# EAGLE board tulip breakout (EAGLE 9.6.2)
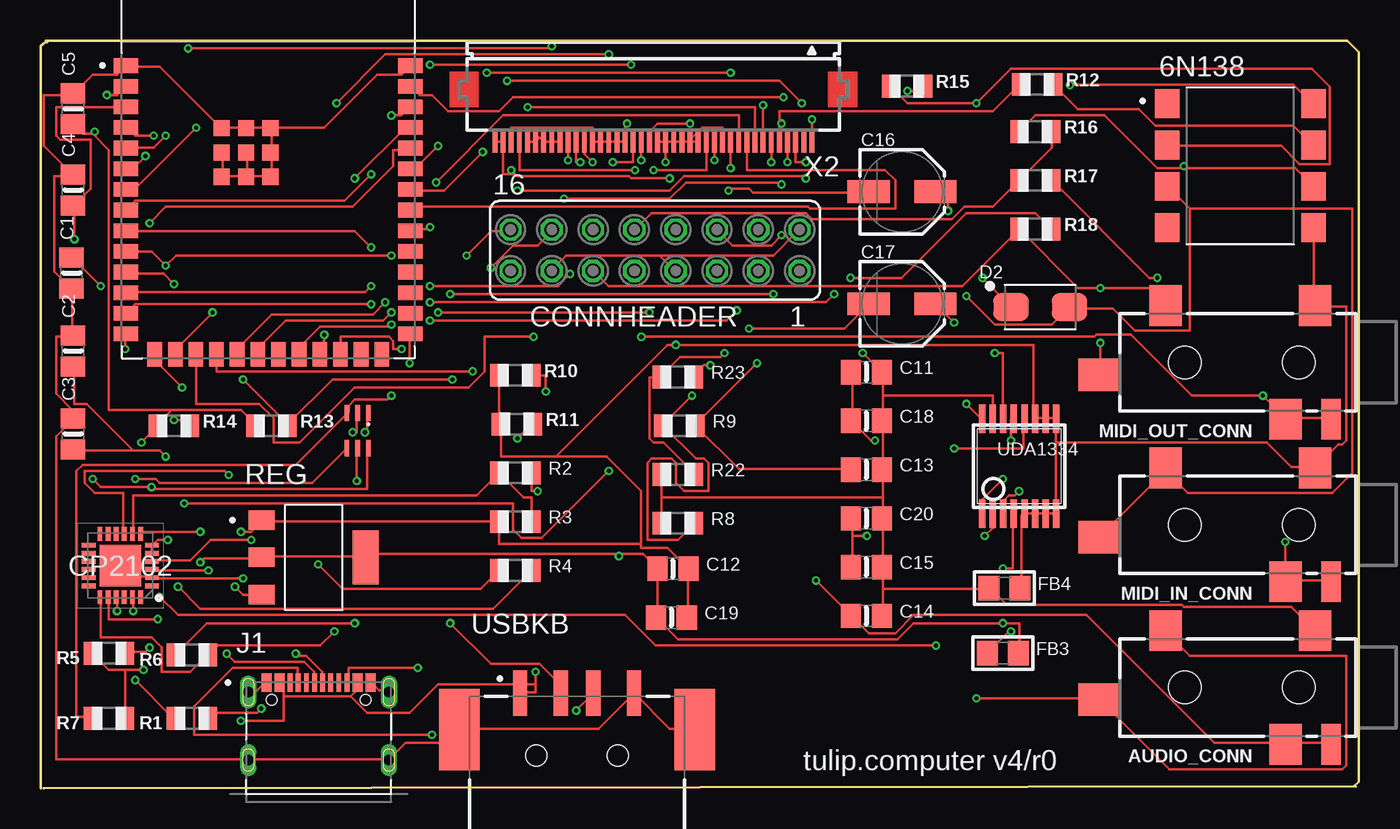
[diagram p0: board, top side]
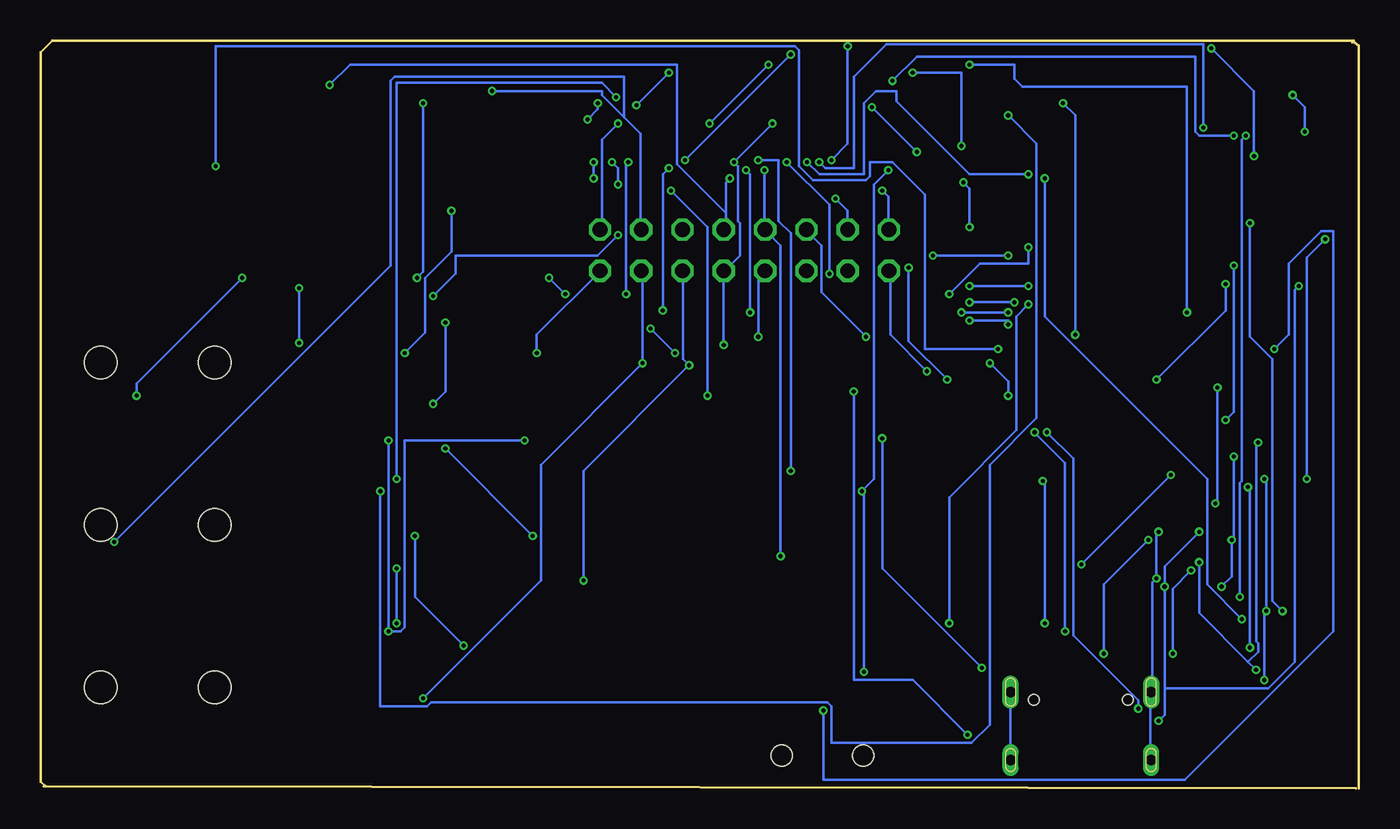
[diagram p1: board, bottom side, seen from below]

Size 81.1 x 46 mm. Coordinates in mm from the lower left corner, seen from the top.
Outline: 0.3,46 80.4,46 81.1,45.3 81.1,0.4 80.8,0.1
Outline: 0,0 0,45.7 0.4,46 0.4,45.9
Outline: 0.2,0 80.9,0.1
Copper layers (1*16): Top 0.035559375mm / dielectric 1.6mm / Bottom 0.035559375mm
Design rules "oshpark-2layer *": minimum track width 6mil, minimum drill 10mil, track to track 6mil, track to pad 6mil, pad to pad 6mil, via to via 6mil, smd to smd 6mil, copper to edge 0mil, drill to drill 6mil, minimum pad ring 5mil, minimum via ring 5mil, stop-mask expansion 2.5mil, vias tented up to drill 0mil, thermal gap 10mil

## Footprints (pad centres in the part's own frame; a part is rotated, then mirrored left to right if it is on the bottom)
COUPL_6N138SDM = smd 1.52 x 1.78: 1 -4.505,3.81; 2 -4.505,1.27; 3 -4.505,-1.27; 4 -4.505,-3.81; 5 4.505,-3.81; 6 4.505,-1.27; 7 4.505,1.27; 8 4.505,3.81
4UCONN_19269 = smd 2 x 2.5: 1 2.5,-3.5; 2 11.7,-3.5; 3 4.3,3.5 | smd 2.5 x 2: 4 15.8,0.75 | smd 1.2 x 2.5: 5 1.5,3.5 | hole 2: 3.5,0; 10.5,0
0805-NO = smd 1.24 x 1.5: 1 -0.95,0; 2 0.95,0
PANASONIC_C = smd 2.6 x 1.4: + 2.05,0; - -2.05,0
FE08-2 = drill 0.914 octagon: 1 -8.89,1.27; 2 -8.89,-1.27; 3 -6.35,1.27; 4 -6.35,-1.27; 5 -3.81,1.27; 6 -3.81,-1.27; 7 -1.27,1.27; 8 -1.27,-1.27; 9 1.27,1.27; 10 1.27,-1.27; 11 3.81,1.27; 12 3.81,-1.27; 13 6.35,1.27; 14 6.35,-1.27; 15 8.89,1.27; 16 8.89,-1.27
QFN50P400X400X80-25N = smd 0.85 x 0.3: 1 -1.95,1.25; 2 -1.95,0.75; 3 -1.95,0.25; 4 -1.95,-0.25; 5 -1.95,-0.75; 6 -1.95,-1.25; 13 1.95,-1.25; 14 1.95,-0.75; 15 1.95,-0.25; 16 1.95,0.25; 17 1.95,0.75; 18 1.95,1.25 | smd 0.3 x 0.85: 7 -1.25,-1.95; 8 -0.75,-1.95; 9 -0.25,-1.95; 10 0.25,-1.95; 11 0.75,-1.95; 12 1.25,-1.95; 19 1.25,1.95; 20 0.75,1.95; 21 0.25,1.95; 22 -0.25,1.95; 23 -0.75,1.95; 24 -1.25,1.95 | smd 2.55 x 2.55: 25 0,0
DIOM449X264X300L114X135N = smd 2.17 x 1.69: A 1.795,0; C -1.795,0
0805 = smd 1.3 x 1.5: 1 -0.95,0; 2 0.95,0
VALCON_CSP-USC16-TR = smd 0.3 x 1.14: A1 -3.35,0; A4 -2.55,0; A5 -1.25,0; A6 -0.25,0; A7 0.25,0; A8 1.25,0; A9 2.55,0; A12 3.35,0; B1 3.05,0; B4 2.25,0; B5 1.75,0; B6 0.75,0; B7 -0.75,0; B8 -1.75,0; B9 -2.25,0; B12 -3.05,0 | drill 0.65 pad 1 long: S1 -4.325,-0.59; S2 4.325,-0.59 | drill 0.65 pad 0.9 long: S3 -4.325,-4.77; S4 4.325,-4.77 | hole 0.65: -2.89,-1.07; 2.89,-1.07
R0805 = smd 1.1 x 1.4: 1 -1,0; 2 1,0
VREG_TS1117BCW33_RPG = smd 1.6 x 1.2: 1 -3.2,2.3; 2 -3.2,0; 3 -3.2,-2.3 | smd 1.6 x 3.3: 4 3.2,0
SOT236 = smd 0.3 x 1: 1 -0.66,-1.09; 2 0,-1.09; 3 0.66,-1.09; 4 0.66,1.09; 5 0,1.09; 6 -0.66,1.09
XCVR_ESP32-S3-WROOM-2-N32R8V = smd 1.5 x 0.9: 1 -8.75,5.26; 2 -8.75,3.99; 3 -8.75,2.72; 4 -8.75,1.45; 5 -8.75,0.18; 6 -8.75,-1.09; 7 -8.75,-2.36; 8 -8.75,-3.63; 9 -8.75,-4.9; 10 -8.75,-6.17; 11 -8.75,-7.44; 12 -8.75,-8.71; 13 -8.75,-9.98; 14 -8.75,-11.25; 27 8.75,-11.25; 28 8.75,-9.98; 29 8.75,-8.71; 30 8.75,-7.44; 31 8.75,-6.17; 32 8.75,-4.9; 33 8.75,-3.63; 34 8.75,-2.36; 35 8.75,-1.09; 36 8.75,0.18; 37 8.75,1.45; 38 8.75,2.72; 39 8.75,3.99; 40 8.75,5.26 | smd 0.9 x 1.5: 15 -6.985,-12.5; 16 -5.715,-12.5; 17 -4.445,-12.5; 18 -3.175,-12.5; 19 -1.905,-12.5; 20 -0.635,-12.5; 21 0.635,-12.5; 22 1.905,-12.5; 23 3.175,-12.5; 24 4.445,-12.5; 25 5.715,-12.5; 26 6.985,-12.5 | smd 1 x 1: 41_1 -1.36,-0.09; 41_2 -2.86,-0.09; 41_3 0.14,-0.09; 41_4 -2.86,-1.59; 41_5 -1.36,-1.59; 41_6 0.14,-1.59; 41_7 -2.86,1.41; 41_8 -1.36,1.41; 41_9 0.14,1.41
SSOP16_4.4MM = smd 0.4 x 1.75: 1 -2.275,-2.92; 2 -1.625,-2.92; 3 -0.975,-2.92; 4 -0.325,-2.92; 5 0.325,-2.92; 6 0.975,-2.92; 7 1.625,-2.92; 8 2.275,-2.92; 9 2.275,2.92; 10 1.625,2.92; 11 0.975,2.92; 12 0.325,2.92; 13 -0.325,2.92; 14 -0.975,2.92; 15 -1.625,2.92; 16 -2.275,2.92
SAMTEC_USB-A-S-X-X-SM2 = smd 0.9 x 2.8: 01 -3.5,3.85; 02 -1,3.85; 03 1,3.85; 04 3.5,3.85 | smd 2.5 x 5: S1 -7.25,1.6; S2 7.25,1.6 | hole 1.3: -2.5,0; 2.5,0
FH12-40S-0.5SH = smd 0.3 x 1.3: 1 -9.75,3.25; 2 -9.25,3.25; 3 -8.75,3.25; 4 -8.25,3.25; 5 -7.75,3.25; 6 -7.25,3.25; 7 -6.75,3.25; 8 -6.25,3.25; 9 -5.75,3.25; 10 -5.25,3.25; 11 -4.75,3.25; 12 -4.25,3.25; 13 -3.75,3.25; 14 -3.25,3.25; 15 -2.75,3.25; 16 -2.25,3.25; 17 -1.75,3.25; 18 -1.25,3.25; 19 -0.75,3.25; 20 -0.25,3.25; 21 0.25,3.25; 22 0.75,3.25; 23 1.25,3.25; 24 1.75,3.25; 25 2.25,3.25; 26 2.75,3.25; 27 3.25,3.25; 28 3.75,3.25; 29 4.25,3.25; 30 4.75,3.25; 31 5.25,3.25; 32 5.75,3.25; 33 6.25,3.25; 34 6.75,3.25; 35 7.25,3.25; 36 7.75,3.25; 37 8.25,3.25; 38 8.75,3.25; 39 9.25,3.25; 40 9.75,3.25

## Placement (x,y rotation side)
6N138  6N138SDM  [COUPL_6N138SDM]  73.8,38.3 0 top
AUDIO_CONN  19269  [4UCONN_19269]  80.9,6.2 180 top
C1  0.1uF  [0805-NO]  1.9,31.7 90 top
C2  0.1uF  [0805-NO]  2,26.9 90 top
C3  4.7uF  [0805-NO]  2,21.8 90 top
C4  4.7uF  [0805-NO]  2,36.8 90 top
C5  4.7uF  [0805-NO]  2,41.8 90 top
C11  0.1uF  [0805-NO]  50.8,25.6 0 top
C12  0.1uF  [0805-NO]  38.9,13.5 0 top
C13  0.01uF  [0805-NO]  50.8,19.6 0 top
C14  0.01uF  [0805-NO]  50.8,10.6 0 top
C15  0.1uF  [0805-NO]  50.8,13.6 0 top
C16  47uF  [PANASONIC_C]  53,36.7 0 top
C17  47uF  [PANASONIC_C]  53,29.8 0 top
C18  10uF  [0805-NO]  50.8,22.6 0 top
C19  10uF  [0805-NO]  38.8,10.5 0 top
C20  10uF  [0805-NO]  50.8,16.6 0 top
CONNHEADER  [FE08-2]  37.8,33.1 180 top
CP2102  CP2102N-A02-GQFN24  [QFN50P400X400X80-25N]  4.9,13.7 180 top
D2  EGF1A  [DIOM449X264X300L114X135N]  61.5,29.6 0 top
FB3  Ferrite  [0805]  59.2,8.3 0 top
FB4  Ferrite  [0805]  59.3,12.3 0 top
J1  CSP-USC16-TR  [VALCON_CSP-USC16-TR]  17.1,6.5 0 top
MIDI_IN_CONN  19269  [4UCONN_19269]  80.9,16.2 180 top
MIDI_OUT_CONN  19269  [4UCONN_19269]  80.9,26.2 180 top
R1  100k  [R0805]  9.3,4.3 180 top
R2  22.1k  [R0805]  29.2,19.4 0 top
R3  47.5k  [R0805]  29.2,16.4 0 top
R4  10k  [R0805]  29.2,13.4 0 top
R5  10k  [R0805]  4.2,8.3 180 top
R6  100k  [R0805]  9.3,8.2 180 top
R7  10k  [R0805]  4.2,4.3 180 top
R8  220k  [R0805]  39.2,16.3 0 top
R9  100  [R0805]  39.3,22.3 0 top
R10  5.1K  [R0805]  29.2,25.4 0 top
R11  5.1K  [R0805]  29.3,22.4 0 top
R12  4.7K  [R0805]  61.3,43.3 0 top
R13  4.7K  [R0805]  14.2,22.3 0 top
R14  4.7K  [R0805]  8.2,22.3 0 top
R15  220  [R0805]  53.3,43.2 0 top
R16  470  [R0805]  61.2,40.4 0 top
R17  33  [R0805]  61.2,37.4 0 top
R18  10  [R0805]  61.2,34.4 0 top
R22  220k  [R0805]  39.2,19.3 0 top
R23  100  [R0805]  39.2,25.3 0 top
REG  TS1117BCW33_RPG  [VREG_TS1117BCW33_RPG]  16.8,14.2 0 top
RESET  MBT3904DW1T1G  [SOT236]  19.5,22 180 top
U1  ESP32-S3-WROOM-2-N32R8V  [XCVR_ESP32-S3-WROOM-2-N32R8V]  14,39.2 0 top
UDA1334  UDA1334ATS  [SSOP16_4.4MM]  60.2,19.8 0 top
USBKB  USB-A-S-X-X-SM2  [SAMTEC_USB-A-S-X-X-SM2]  33,2 0 top
X2  FH12-40S-0.5SH  [FH12-40S-0.5SH]  37.7,43 180 top

## Library data of the parts
6N138 = 6N138SDM; AVAILABILITY: In Stock; DESCRIPTION: Optoisolator Darlington with Base Output 5000Vrms 1 Channel 8-SMD; MF: ON Semiconductor; MP: 6N138SDM; PACKAGE: PDIP GW-8 ON Semiconductor; PRICE: None; PURCHASE-URL: https://pricing.snapeda.com/search/part/6N138SDM/?ref=eda
AUDIO_CONN C1-C5 C11-C20 FB3 FB4 MIDI_IN_CONN MIDI_OUT_CONN UDA1334 = microbuilder
CONNHEADER = con-lsta; OC_FARNELL: unknown; OC_NEWARK: unknown
CP2102 = CP2102N-A02-GQFN24; AVAILABILITY: In Stock; DESCRIPTION: USB Bridge, USB to UART USB 2.0 UART Interface 24-QFN (4x4); MF: Silicon Labs; MP: CP2102N-A02-GQFN24; PACKAGE: WFQFN-24 Silicon Labs; PRICE: None; PURCHASE-URL: https://pricing.snapeda.com/search/part/CP2102N-A02-GQFN24/?ref=eda
D2 = EGF1A; AVAILABILITY: In Stock; DESCRIPTION: Diode Standard 50 V 1A Surface Mount DO-214AC (SMA); MF: ON Semiconductor; MP: EGF1A; PACKAGE: SMA-2 ON Semiconductor; PRICE: None; PURCHASE-URL: https://pricing.snapeda.com/search/part/EGF1A/?ref=eda
J1 = CSP-USC16-TR; AVAILABILITY: In Stock; DESCRIPTION: CSP-USC16-TR Valcon USB Type C Surface Mount PCB Socket; MF: Valcon; MP: CSP-USC16-TR; PACKAGE: None; PRICE: None; PURCHASE-URL: https://pricing.snapeda.com/search/part/CSP-USC16-TR/?ref=eda
R1-R18 R22 R23 = adafruit
REG = TS1117BCW33_RPG; AVAILABILITY: In Stock; DESCRIPTION: 1A 3.3V LOW DROPOUT VOLTAGE REGULATOR; MF: Taiwan Semiconductor; MP: TS1117BCW33 RPG; PACKAGE: SOT-223 Taiwan Semiconductor; PRICE: None; PURCHASE-URL: https://pricing.snapeda.com/search/part/TS1117BCW33 RPG/?ref=eda
RESET = MBT3904DW1T1G; AVAILABILITY: In Stock; DESCRIPTION: Bipolar (BJT) Transistor Array 2 NPN (Dual) 40V 200mA 300MHz 150mW Surface Mount SC-88/SC70-6/SOT-363; MF: ON Semiconductor; MP: MBT3904DW1T1G; PACKAGE: SC-88-6 ON Semiconductor; PRICE: None; PURCHASE-URL: https://pricing.snapeda.com/search/part/MBT3904DW1T1G/?ref=eda
U1 = ESP32-S3-WROOM-2-N32R8V; AVAILABILITY: In Stock; DESCRIPTION: Bluetooth, WiFi 802.11b/g/n, Bluetooth v5.0 Transceiver Module 2.4GHz PCB Trace Surface Mount; MF: Espressif Systems; MP: ESP32-S3-WROOM-2-N32R8V; PACKAGE: Package; PRICE: None; PURCHASE-URL: https://pricing.snapeda.com/search/part/ESP32-S3-WROOM-2-N32R8V/?ref=eda
USBKB = USB-A-S-X-X-SM2; AVAILABILITY: In Stock; DESCRIPTION: USB-A (USB TYPE-A) USB 2.0 Receptacle Connector 4 Position Surface Mount, Right Angle; MF: Samtec; MP: USB-A-S-F-W-SM2-TR; PACKAGE: None; PRICE: None; PURCHASE-URL: https://pricing.snapeda.com/search/part/USB-A-S-F-W-SM2-TR/?ref=eda
X2 = con-hirose; MPN: FH12-40S-0.5SH(55); OC_FARNELL: 1324556; OC_NEWARK: 34M6178

## Nets
3V3: C5.1 C12.1 C19.1 CONNHEADER.10 FB3.2 R5.2 R7.1 R13.1 R14.1 R16.2 R17.1 REG.2 REG.4 U1.2 UDA1334.4 X2.37
3V3_USB: C2.1 C3.1 CP2102.5 CP2102.6 R4.2
5V_USB: 6N138.8 C1.2 CONNHEADER.8 CP2102.7 J1.A4 J1.A9 J1.B4 J1.B9 R2.2 REG.3 USBKB.01 X2.39 X2.40
!DTR: CP2102.23 R1.2 RESET.4
!RTS: CP2102.19 R6.1 RESET.1
AGND: AUDIO_CONN.1 C11.2 C13.2 C14.2 C15.2 C18.2 C20.2 CONNHEADER.1 FB4.1 R8.1 R22.1 UDA1334.15
B6: U1.20 X2.14
B7: U1.23 X2.13
BCLK: U1.39 UDA1334.1
BLEN: U1.32 X2.10
D+: U1.14 USBKB.03
D-: U1.13 USBKB.02
DE: U1.35 X2.7
DIN: U1.38 UDA1334.3
ESP32_EN: C4.1 R5.1 RESET.6 U1.3
G5: U1.12 X2.23
G6: U1.15 X2.22
G7: U1.16 X2.21
GND: 6N138.5 C1.1 C2.2 C3.2 C4.2 C5.2 C12.2 C19.2 CONNHEADER.2 CONNHEADER.7 CONNHEADER.13 CP2102.2 CP2102.25 FB4.2 J1.A1 J1.A12 J1.B1 J1.B12 J1.S1 J1.S2 J1.S3 J1.S4 MIDI_IN_CONN.1 MIDI_OUT_CONN.1 R3.1 R10.1 R11.1 R12.1 REG.1 U1.1 U1.40 U1.41_1 U1.41_2 U1.41_3 U1.41_4 U1.41_5 U1.41_6 U1.41_7 U1.41_8 U1.41_9 UDA1334.5 UDA1334.6 UDA1334.7 UDA1334.8 UDA1334.9 UDA1334.10 UDA1334.11 USBKB.04 USBKB.S1 USBKB.S2 X2.5 X2.12 X2.15 X2.16 X2.17 X2.18 X2.19 X2.20 X2.24 X2.25 X2.26 X2.27 X2.28 X2.32 X2.33 X2.34 X2.35 X2.36 X2.38
GPIO10: CONNHEADER.15 U1.18
HSYNC: U1.33 X2.9
INT: U1.5 X2.1
IO0: R7.2 RESET.3 U1.27
LOUT: AUDIO_CONN.2 AUDIO_CONN.4 C13.1 CONNHEADER.3 R9.2
LRC: U1.4 UDA1334.2
MIDI_IN: 6N138.6 R16.1 U1.24
MIDI_IN_SINK: 6N138.3 CONNHEADER.6 D2.A MIDI_IN_CONN.2 MIDI_IN_CONN.4
MIDI_IN_SOURCE: CONNHEADER.4 MIDI_IN_CONN.3 MIDI_IN_CONN.5 R15.2
MIDI_OUT: R18.2 U1.19
MIDI_OUT_SINK: CONNHEADER.11 MIDI_OUT_CONN.2 MIDI_OUT_CONN.4 R18.1
MIDI_OUT_SOURCE: CONNHEADER.9 MIDI_OUT_CONN.3 MIDI_OUT_CONN.5 R17.2
N$1: R1.1 RESET.2
N$2: R6.2 RESET.5
N$3: J1.B5 R11.2
N$4: J1.A5 R10.2
N$5: C11.1 C18.1 FB3.1 UDA1334.13
N$6: C16.- R8.2 R9.1
N$9: C17.- R22.2 R23.1
N$10: C15.1 C20.1 UDA1334.12
N$11: C17.+ UDA1334.16
N$12: C16.+ UDA1334.14
N$30: 6N138.2 D2.C R15.1
N$32: 6N138.7 R12.2
PCLK: U1.22 X2.11
PWM: U1.9 X2.6
PWR: CONNHEADER.12 U1.17
R5: U1.6 X2.31
R6: U1.7 X2.30
R7: U1.8 X2.29
ROUT: AUDIO_CONN.3 AUDIO_CONN.5 C14.1 CONNHEADER.5 R23.2
SCL: CONNHEADER.16 R14.2 U1.10 X2.3
SDA: CONNHEADER.14 R13.2 U1.11 X2.4
UART0_RXD: CP2102.21 U1.36
UART0_TXD: CP2102.20 U1.37
USB_RESET: CP2102.9 R4.1
USB_VBUS: CP2102.8 R2.1 R3.2
USBC_D+: CP2102.3 J1.A6
USBC_D-: CP2102.4 J1.A7
VSYNC: U1.34 X2.8

## Tracks (layer width: path | path; a pad name or v marks a point on that pad's centre or on a via)
3V3  (via drill 0.25)
  Top 0.152: R16.2 62.2,39.4 R17.1 58.58,35.77 56.83,35.77 56.08,35.02 47.45,35.02 47.08,35.4 37.58,35.4 36.58,34.4 CONNHEADER.10 | X2.37 29.45,38.02 v36.58,38.02 | 8.07,23.27 7.2,22.4 R14.1 7.2,22.27 v6.2,21.27 | 8.07,23.27 12.32,23.27 13.2,22.4 R13.1 | C5.1 2.57,40.27 3.2,40.27 | 3.2,40.27 4.2,39.27 4.2,23.27 8.07,23.27 | v4.07,42.65 4.7,42.65 5.2,43.15 U1.2 | 3.2,40.27 v3.32,40.4 | 5.2,7.28 R7.1 | 5.2,7.28 4.2,7.28 3.2,8.28 R5.2 | v6.32,7.28 5.2,7.28 | v9.82,13.9 10.07,14.15 13.57,14.15 REG.2 13.7,14.28 19.95,14.28 REG.4 20.2,14.4 35.58,14.4 | FB3.2 60.2,8.4 60.2,10.15 v59.2,10.15 53.7,10.15 52.7,9.15 39.2,9.15 C19.1 37.95,10.53 C12.1 37.95,13.53 37.08,14.4 35.58,14.4 | v59.2,13.53 59.83,13.53 59.83,16.77 UDA1334.4 | 35.58,14.4 v35.58,14.28
  Bottom 0.152: v36.58,38.02 36.58,34.4 CONNHEADER.10 36.45,34.27 35.58,33.4 v35.58,14.28 | v4.07,42.65 3.32,41.9 v3.32,40.4 | 6.82,7.78 9.82,10.78 v9.82,13.9 | 6.82,7.78 v6.32,7.28 | v59.2,10.15 v59.2,13.53 | v6.2,21.27 6.32,21.15 6.32,9.03 6.2,8.9 6.2,8.4 6.82,7.78
3V3_USB  (via drill 0.25)
  Top 0.152: CP2102.5 6.82,14.53 6.82,14.9 CP2102.6 6.95,15.03 7.2,15.28 v7.82,15.28 | v7.7,20.4 7.32,20.77 5.7,20.77 | 5.7,20.77 2.07,20.77 C3.1 | R4.2 27.82,11.03 9.82,11.03 v8.45,12.4 | 5.7,20.77 2.82,23.65 2.07,23.65 2.07,25.9 C2.1
  Bottom 0.152: v7.7,20.4 7.7,15.4 v7.82,15.28 7.82,13.03 v8.45,12.4
5V_USB  (via drill 0.25)
  Top 0.152: J1.A4 14.57,6.53 14.82,6.53 J1.B9 14.95,6.4 14.95,5.65 | J1.A9 19.57,6.53 19.45,6.53 J1.B4 19.32,6.4 19.32,5.9 19.07,5.65 | 19.07,5.65 14.95,5.65 | R2.2 30.2,18.27 v30.57,18.27 | 30.45,6.4 30.45,5.9 29.57,5.9 USBKB.01 | 30.45,6.4 v30.45,7.15 | 19.07,5.65 20.07,4.65 22.7,4.65 24.45,6.4 30.45,6.4 | v9.82,15.78 6.32,15.78 6.2,15.65 CP2102.7 | v11.95,12.4 12.45,11.9 REG.3 | v3.7,30.9 1.95,32.65 C1.2 | 14.95,5.65 14.95,4.15 v12.32,4.15 | X2.40 27.95,39.77 28.45,39.77 X2.39 28.45,37.77 28.95,37.77 | 28.95,37.77 29.2,37.77 29.32,37.65 36.2,37.65 36.33,37.52 v38.7,37.52 | v63.33,43.27 77.08,43.27 78.2,42.15 6N138.8 | 28.95,37.77 v28.95,38.02
  Bottom 0.152: v30.45,7.15 30.45,18.15 v30.57,18.27 29.82,19.02 29.82,37.15 v28.95,38.02 | v9.82,15.78 11.95,13.65 v11.95,12.4 11.95,6.15 | v3.7,30.9 3.95,30.65 3.95,7.78 5.57,6.15 11.95,6.15 | v12.32,4.15 11.95,4.53 11.95,6.15 | v38.7,37.52 38.95,37.27 38.95,35.4 | 38.95,35.4 38.95,34.4 CONNHEADER.8 | v63.33,43.27 62.08,44.52 41.95,44.52 41.95,38.4 38.95,35.4
!DTR  (via drill 0.25)
  Top 0.152: v5.7,10.9 5.7,11.65 CP2102.23 | v5.82,6.65 8.07,4.4 8.2,4.4 R1.2 | v5.82,19.02 7.07,19.02 7.32,18.77 16.7,18.77 18.82,20.9 RESET.4
  Bottom 0.152: v5.82,6.65 5.82,10.78 v5.7,10.9 5.7,18.9 v5.82,19.02
!RTS  (via drill 0.25)
  Top 0.152: CP2102.19 3.7,11.65 3.7,9.28 6.82,9.28 7.45,8.65 7.45,7.15 9.2,7.15 10.2,8.15 R6.1 10.32,8.28 10.82,8.78 17.2,8.78 v18.07,9.65 | v19.95,21.9 20.07,21.9 20.07,23.02 RESET.1
  Bottom 0.152: v19.95,21.9 18.07,20.02 v18.07,9.65
AGND  (via drill 0.25)
  Top 0.152: 51.83,24.15 51.83,25.52 C11.2 v50.58,26.77 | 51.83,24.15 51.83,22.65 C18.2 51.83,22.52 51.83,19.65 C13.2 51.83,19.52 51.83,17.9 | UDA1334.15 58.58,24.15 51.83,24.15 | R22.1 38.2,17.9 | 38.2,17.9 R8.1 | 51.83,17.9 51.83,16.65 C20.2 51.83,16.52 51.83,13.65 C15.2 51.83,13.53 51.83,12.28 | 51.83,17.9 38.2,17.9 | 51.83,12.28 51.83,10.65 C14.2 | 51.83,12.28 58.33,12.28 FB4.1 58.45,12.28 59.45,11.28 70.2,11.28 70.33,11.15 76.95,11.15 AUDIO_CONN.1
  Bottom 0.152: v50.58,26.77 50.58,27.9 46.7,31.77 CONNHEADER.1
B6  (via drill 0.25)
  Top 0.152: X2.14 40.95,38.02 v37.7,38.02 | v24.45,29.27 v37.45,29.27 | v21.57,29.27 21.07,28.77 15.07,28.77 13.45,27.15 13.45,26.77 U1.20
  Bottom 0.152: v37.7,38.02 37.45,37.77 v37.45,29.27 | v21.57,29.27 v24.45,29.27
B7  (via drill 0.25)
  Top 0.152: v41.45,38.65 X2.13 | v34.95,45.15 21.2,45.15 v18.2,42.15 | v17.45,27.9 17.45,26.77 17.2,26.77 U1.23
  Bottom 0.152: v34.95,45.15 v41.45,38.65 | v18.2,42.15 17.45,41.4 v17.45,27.9
BCLK  (via drill 0.25)
  Top 0.152: v45.7,42.52 29.07,42.52 28.2,41.65 25.07,41.65 24.07,42.65 23.32,42.65 22.82,43.15 U1.39 | v59.2,19.02 57.95,17.77 57.95,16.9 UDA1334.1
  Bottom 0.152: v45.7,42.52 46.58,43.4 59.2,43.4 v59.2,19.02
BLEN  (via drill 0.25)
  Top 0.152: X2.10 42.95,41.4 28.45,41.4 v24.32,37.27 | v23.95,34.52 23.82,34.4 22.82,34.4 U1.32
  Bottom 0.152: v24.32,37.27 23.95,36.9 v23.95,34.52
D+  (via drill 0.25)
  Top 0.152: v5.2,27.02 5.2,27.9 U1.14 | v32.95,4.78 33.95,5.78 USBKB.03
  Bottom 0.152: v5.2,27.02 4.32,27.9 4.32,32.27 2.32,34.27 1.57,34.27 1.57,9.65 10.7,0.53 32.95,0.53 v32.95,4.78
D-  (via drill 0.25)
  Top 0.152: v20.32,29.77 5.82,29.77 5.32,29.27 U1.13 | v25.2,10.15 27.7,7.65 30.7,7.65 31.95,6.4 31.95,5.9 USBKB.02
  Bottom 0.152: v20.32,29.77 21.07,29.02 21.07,22.02 25.2,17.9 v25.2,10.15
DE  (via drill 0.25)
  Top 0.152: v44.45,42.02 X2.7 | v27.45,44.02 v42.45,44.02 | v24.45,39.52 23.07,38.15 22.82,38.15 U1.35
  Bottom 0.152: v42.45,44.02 v44.45,42.02 | v27.45,44.02 24.45,44.02 v24.45,39.52
DIN  (via drill 0.25)
  Top 0.152: v21.57,41.4 22.2,41.4 22.7,41.9 U1.38 | v60.2,18.27 59.95,18.02 59.58,18.02 59.33,17.77 59.33,16.9 UDA1334.3
  Bottom 0.152: v21.57,41.4 19.82,39.65 19.82,22.77 22.7,19.9 22.7,3.9 23.82,2.77 32.45,2.77 32.45,5.03 32.7,5.28 57.08,5.28 57.33,5.03 60.2,5.03 v60.2,18.27
ESP32_EN  (via drill 0.25)
  Top 0.152: U1.3 5.2,41.9 0.95,41.9 0.95,40.15 1.2,39.9 3.07,39.9 3.07,36.9 2.07,35.9 C4.1 2.07,35.77 v2.07,33.77 | v6.7,8.65 6.45,8.4 5.2,8.4 R5.1 | RESET.6 20.07,20.9 20.07,18.4 6.95,18.4 v6.82,18.52 3.7,18.52 v3.2,19.02
  Bottom 0.152: v6.82,18.52 6.7,18.4 v6.7,8.65 | v2.07,33.77 3.2,32.65 v3.2,19.02
G5  (via drill 0.25)
  Top 0.152: X2.23 36.45,38.52 v35.2,38.52 | v32.58,31.65 31.82,30.9 v23.95,30.9 | v20.32,30.9 19.95,30.52 5.32,30.52 U1.12
  Bottom 0.152: v35.2,38.52 32.58,35.9 v32.58,31.65 | v20.32,30.9 v23.95,30.9
G6  (via drill 0.25)
  Top 0.152: v36.95,38.65 X2.22 | v34.95,19.52 30.82,15.4 29.57,15.4 29.07,15.9 29.07,17.52 v8.82,17.52 | v8.7,24.65 7.07,26.27 7.07,26.65 U1.15
  Bottom 0.152: v36.95,38.65 35.7,38.65 35.7,34.9 34.95,34.15 v34.95,19.52 | v8.82,17.52 8.7,17.65 v8.7,24.65
G7  (via drill 0.25)
  Top 0.152: X2.21 37.45,40.4 37.95,40.9 v39.95,40.9 | v23.95,44.52 v36.33,44.52 | v10.57,29.27 8.32,27.02 8.32,26.77 U1.16
  Bottom 0.152: v36.33,44.52 v39.95,40.9 | v23.95,44.52 21.2,44.52 21.2,43.65 20.7,43.15 10.57,43.15 v10.57,29.27
GND  (via drill 0.25)
  Top 0.152: 45.45,40.9 45.45,41.65 58.58,41.65 60.2,43.27 R12.1 | 45.45,40.9 X2.5 | 34.45,39.77 33.95,39.77 | 34.45,39.77 34.95,39.77 | 34.45,39.77 X2.27 | 34.95,39.77 35.45,39.77 | 34.95,39.77 X2.26 | 35.45,39.77 35.95,39.77 | 35.45,39.77 X2.25 | 30.45,39.77 29.95,39.77 X2.36 | X2.38 28.95,40.65 30.07,40.65 | 30.95,39.77 30.7,40.02 | 30.7,40.02 30.07,40.65 | 30.95,39.77 31.45,39.77 | 30.95,39.77 X2.34 | 31.45,39.77 31.95,39.77 X2.32 | 31.45,39.77 X2.33 | 30.7,40.02 30.45,39.77 | 30.45,39.77 X2.35 | 33.95,39.77 33.95,40.65 30.07,40.65 | 33.95,39.77 X2.28 | 38.45,39.77 37.95,39.77 X2.20 | 38.45,39.77 38.95,39.77 | 38.45,39.77 X2.19 v38.45,38.52 | 38.95,39.77 39.45,39.77 | 38.95,39.77 X2.18 | 39.45,39.77 39.83,39.77 | 39.83,39.77 39.95,39.77 | 39.45,39.77 X2.17 | 39.95,39.77 40.45,39.77 X2.15 | 39.95,39.77 X2.16 39.83,39.77 | X2.12 41.95,40.65 40.7,40.65 39.83,39.77 | 38.08,32.77 32.33,32.77 31.45,31.9 CONNHEADER.13 | 38.08,32.77 38.95,31.9 CONNHEADER.7 | 38.08,32.77 45.08,32.77 46.58,34.27 CONNHEADER.2 | 35.95,39.77 35.95,40.9 v36.08,40.9 | 35.95,39.77 X2.24 | v45.58,40.9 45.45,40.9 | 11.2,37.65 11.2,39.02 U1.41_2 | 12.7,37.65 12.7,39.02 U1.41_1 | 11.2,37.65 12.57,37.65 U1.41_5 12.7,37.65 | 11.2,37.65 U1.41_4 | 12.7,37.65 14.07,37.65 U1.41_6 14.2,37.65 14.2,39.02 U1.41_3 14.2,39.15 14.2,40.52 U1.41_9 | U1.41_9 14.07,40.65 12.7,40.65 U1.41_8 12.57,40.65 11.2,40.65 U1.41_7 11.07,40.65 7.32,44.4 5.32,44.4 U1.1 5.2,44.4 4.7,43.9 3.2,43.9 2.07,42.77 C5.2 1.95,42.65 0.2,42.65 0.2,39.52 1.95,37.77 C4.2 1.95,37.65 0.82,37.65 0.82,31.77 1.82,30.77 C1.1 1.95,30.65 1.95,27.9 C2.2 1.95,27.77 0.95,27.77 0.95,24.27 1.95,23.27 1.95,22.77 C3.2 1.95,22.65 0.95,21.65 0.95,1.77 12.7,1.77 J1.S3 12.82,1.77 21.32,1.77 J1.S4 21.45,1.77 22.45,2.77 24.95,2.77 25.7,3.52 USBKB.S1 25.82,3.65 34.33,3.65 36.45,5.78 USBKB.04 38.7,3.65 40.2,3.65 USBKB.S2
  Top 0.152: U1.40 22.7,44.4 22.2,43.9 20.7,43.9 17.45,40.65 14.2,40.65 U1.41_9 | 61.83,22.77 61.2,22.77 UDA1334.11 61.08,22.77 61.08,27.27 v39.08,27.27 38.58,27.27 31.7,20.4 | 61.83,22.77 62.45,22.77 UDA1334.9 62.45,22.65 62.45,21.27 | 61.83,22.77 UDA1334.10 | FB4.2 60.33,12.4 60.33,16.77 60.45,16.77 UDA1334.5 60.58,16.9 61.08,16.9 UDA1334.6 61.2,16.9 61.83,16.9 | 61.83,16.9 62.45,16.9 | 61.83,16.9 UDA1334.7 | 62.45,16.9 62.45,21.27 | 62.45,16.9 UDA1334.8 | 6N138.5 78.33,34.4 78.33,29.77 MIDI_OUT_CONN.1 78.45,29.65 80.33,29.65 80.33,21.4 80.08,21.15 79.83,21.15 78.45,19.77 MIDI_IN_CONN.1 78.33,19.77 76.95,19.77 75.45,21.27 62.45,21.27 | R10.1 28.2,22.4 R11.1 28.32,22.4 28.32,20.4 31.7,20.4 | C19.2 39.83,10.53 39.83,13.4 C12.2 38.58,14.78 36.95,14.78 36.95,15.03 | 31.7,20.4 34.83,20.4 36.95,18.27 36.95,15.03 | 36.95,15.03 28.2,15.03 R3.1 13.7,16.4 REG.1 13.57,16.4 12.95,15.78 v12.32,15.78 | CP2102.25 5.57,13.03 6.82,13.03 CP2102.2 6.95,12.9 v12.45,12.9 | J1.B12 13.95,6.53 13.82,6.53 J1.A1 13.7,6.4 13.32,6.03 12.82,6.03 J1.S1 | J1.B1 20.2,6.53 20.45,6.53 J1.A12 20.45,6.4 20.82,6.03 21.32,6.03 J1.S2
  Bottom 0.152: v36.08,40.9 v38.45,38.52 38.2,38.27 38.2,34.9 38.08,34.77 38.08,32.77 38.95,31.9 CONNHEADER.7 39.08,31.77 v39.08,27.27 | v45.58,40.9 46.58,39.9 46.58,34.4 CONNHEADER.2 | J1.S3 12.82,1.77 12.82,5.9 J1.S1 12.7,6.03 12.7,12.65 v12.45,12.9 12.45,15.65 v12.32,15.78 | J1.S4 21.45,1.77 21.45,5.9 J1.S2
GPIO10  (via drill 0.25)
  Top 0.152: U1.18 10.82,25.65 v26.57,25.65
  Bottom 0.152: v26.57,25.65 28.82,27.9 28.82,31.77 CONNHEADER.15
HSYNC
  Top 0.152: X2.9 43.45,38.02 51.95,38.02 52.58,37.4 52.58,35.65 47.33,35.65 47.2,35.77 22.95,35.77 22.82,35.65 U1.33
INT  (via drill 0.25)
  Top 0.152: v47.45,41.15 X2.1 | v46.83,42.15 45.45,43.52 v28.7,43.52 | v7.7,40.15 6.95,39.4 5.32,39.4 U1.5
  Bottom 0.152: v47.45,41.15 46.83,41.77 v46.83,42.15 | v28.7,43.52 27.2,45.02 10.07,45.02 10.07,40.4 9.82,40.15 v7.7,40.15
IO0  (via drill 0.25)
  Top 0.152: R7.2 3.2,4.4 2.2,4.4 2.2,19.52 2.57,19.9 15.7,19.9 18.82,23.02 RESET.3 18.95,23.15 18.95,23.52 19.32,23.9 21.32,23.9 v21.57,24.15 | v22.7,26.15 22.7,27.9 U1.27
  Bottom 0.152: v22.7,26.15 21.57,25.02 v21.57,24.15
LOUT  (via drill 0.25)
  Top 0.152: C13.1 49.83,19.65 42.95,19.65 R9.2 40.33,22.4 v44.08,26.15 | AUDIO_CONN.2 69.2,9.65 70.7,8.15 80.33,8.15 80.33,1.4 80.08,1.15 69.45,1.15 65.2,5.4 AUDIO_CONN.4 65.08,5.53 v57.58,5.53
  Bottom 0.152: CONNHEADER.3 44.08,31.77 v44.08,26.15 50.33,19.9 50.33,12.78 v57.58,5.53
LRC  (via drill 0.25)
  Top 0.152: v6.95,40.15 5.82,40.15 5.32,40.65 U1.4 | v7.32,11.78 8.45,10.65 35.95,10.65 37.83,8.78 v55.08,8.78 | v58.08,15.53 58.58,16.02 UDA1334.2
  Bottom 0.152: v6.95,40.15 7.2,39.9 7.2,18.9 7.32,18.77 v7.32,11.78 | v55.08,8.78 58.08,11.78 v58.08,15.53
MIDI_IN  (via drill 0.25)
  Top 0.152: R16.1 61.2,41.4 65.45,41.4 68.7,38.15 70.33,38.15 | 70.33,38.15 77.2,38.15 78.2,37.15 6N138.6 | v22.2,27.02 21.7,27.02 21.7,27.52 21.45,27.77 18.45,27.77 18.45,26.77 U1.24 | 70.33,38.15 v70.33,38.27
  Bottom 0.152: v22.2,27.02 26.7,27.02 26.7,36.52 28.7,38.52 30.07,38.52 30.07,37.65 30.32,37.4 33.58,37.4 34.45,38.27 34.45,45.4 34.7,45.65 70.33,45.65 v70.33,38.27
MIDI_IN_SINK  (via drill 0.25)
  Top 0.152: 69.2,19.52 65.2,15.53 MIDI_IN_CONN.4 | 69.2,19.52 MIDI_IN_CONN.2 69.2,19.65 | 70.7,35.65 69.33,37.02 6N138.3 | 70.7,35.65 70.7,28.15 67.33,28.15 65.95,29.52 63.33,29.52 D2.A 63.2,29.52 62.2,28.52 58.7,28.52 v56.95,30.27 | v45.58,34.02 44.95,33.4 42.58,33.4 41.7,34.27 CONNHEADER.6 | 69.2,19.52 70.58,18.15 79.45,18.15 80.7,19.4 80.7,35.65 70.7,35.65
  Bottom 0.152: v45.58,34.02 46.83,32.77 55.58,32.77 55.58,31.65 v56.95,30.27
MIDI_IN_SOURCE  (via drill 0.25)
  Top 0.152: MIDI_IN_CONN.5 79.33,12.78 76.7,12.78 MIDI_IN_CONN.3 76.58,12.78 v76.58,15.15 | v53.33,42.9 53.95,42.9 54.2,43.15 R15.2
  Bottom 0.152: v53.33,42.9 46.58,42.9 46.58,42.65 45.2,41.27 | 45.2,41.27 44.2,40.27 44.2,34.4 CONNHEADER.4 | v76.58,15.15 59.58,32.15 59.58,43.52 59.33,43.77 45.2,43.77 45.2,41.27
MIDI_OUT  (via drill 0.25)
  Top 0.152: R18.2 61.2,35.4 56.95,35.4 52.95,31.4 v49.83,31.4 | v48.83,30.4 48.33,29.9 v23.95,29.9 | v21.2,29.9 20.45,29.15 14.2,29.15 12.2,27.15 12.2,26.77 U1.19
  Bottom 0.152: v48.83,30.4 v49.83,31.4 | v21.2,29.9 v23.95,29.9
MIDI_OUT_SINK  (via drill 0.25)
  Top 0.152: MIDI_OUT_CONN.2 69.2,29.77 68.2,30.77 v65.2,30.77 63.83,30.77 R18.1 56.7,30.9 34.95,30.9 34.08,31.77 CONNHEADER.11 | v65.2,27.4 65.2,25.52 MIDI_OUT_CONN.4
  Bottom 0.152: v65.2,30.77 v65.2,27.4
MIDI_OUT_SOURCE  (via drill 0.25)
  Top 0.152: R17.2 68.2,31.4 v68.7,31.4 | MIDI_OUT_CONN.5 79.33,22.77 76.7,22.77 MIDI_OUT_CONN.3 76.58,22.77 v75.2,24.15 70.83,24.15 67.08,27.9 64.95,27.9 64.83,27.77 v36.95,27.77
  Bottom 0.152: v68.7,31.4 75.2,24.9 v75.2,24.15 | v36.95,27.77 36.95,31.4 36.58,31.77 CONNHEADER.9
N$1  (via drill 0.25)
  Top 0.152: v19.2,21.9 19.45,21.9 19.45,23.02 RESET.2 | v13.57,4.9 13.32,4.65 10.57,4.65 10.32,4.4 R1.1
  Bottom 0.152: v19.2,21.9 17.57,20.27 17.57,9.4 13.57,5.4 v13.57,4.9
N$2  (via drill 0.25)
  Top 0.152: v19.45,18.9 19.45,20.9 RESET.5 | v19.32,10.15 10.2,10.15 8.32,8.28 R6.2
  Bottom 0.152: v19.45,18.9 19.32,18.77 v19.32,10.15
N$3  (via drill 0.25)
  Top 0.152: v23.2,7.4 18.95,7.4 18.95,6.53 J1.B5 | v29.32,21.52 30.2,22.4 R11.2
  Bottom 0.152: v23.2,7.4 29.32,13.53 v29.32,21.52
N$4  (via drill 0.25)
  Top 0.152: v24.07,3.27 9.45,3.27 9.45,5.03 11.82,7.4 15.82,7.4 15.82,6.53 J1.A5 | v31.07,24.4 31.07,25.4 R10.2
  Bottom 0.152: v24.07,3.27 27.45,6.65 31.07,6.65 v31.07,24.4
N$5  (via drill 0.25)
  Top 0.152: C11.1 49.95,25.52 49.95,22.65 C18.1 49.95,22.52 51.08,21.4 v51.33,21.4 | v59.7,9.65 59.58,9.65 58.33,8.4 FB3.1 | v59.7,21.4 59.7,22.65 59.83,22.65 UDA1334.13
  Bottom 0.152: v59.7,21.4 v59.7,9.65 58.95,9.65 58.7,9.9 58.7,21.4 v51.33,21.4
N$6  (via drill 0.25)
  Top 0.152: R8.2 40.2,16.27 39.2,15.28 37.33,15.28 37.33,20.02 37.58,20.27 38.83,20.27 39.08,20.02 39.08,18.77 39.58,18.27 41.08,18.27 41.08,20.02 40.83,20.27 40.33,20.27 R9.1 38.33,22.4 v40.08,24.15 | v42.33,36.77 42.45,36.9 43.58,36.9 43.83,36.65 50.95,36.65 C16.-
  Bottom 0.152: v42.33,36.77 40.08,34.52 v40.08,24.15
N$9  (via drill 0.25)
  Top 0.152: R22.2 40.2,19.4 38.33,21.27 37.7,21.27 37.45,21.52 37.45,25.27 38.2,25.27 R23.1 38.2,25.4 39.33,26.52 41.83,26.52 v42.08,26.77 | v43.58,28.27 49.45,28.27 50.95,29.77 C17.-
  Bottom 0.152: v42.08,26.77 v43.58,28.27
N$10  (via drill 0.25)
  Top 0.152: 49.95,15.53 49.95,16.52 C20.1 | 49.95,15.53 49.95,13.65 C15.1 | v56.2,20.9 60.45,20.9 60.45,22.65 UDA1334.12 | 49.95,15.53 v50.83,15.53
  Bottom 0.152: v50.83,15.53 v56.2,20.9
N$11  (via drill 0.25)
  Top 0.152: v56.95,23.65 57.83,22.77 UDA1334.16 | C17.+ v56.2,28.65
  Bottom 0.152: v56.95,23.65 56.2,24.4 v56.2,28.65
N$12  (via drill 0.25)
  Top 0.152: v58.7,26.77 59.2,26.77 59.2,22.77 UDA1334.14 | v55.83,35.52 55.83,36.65 55.08,36.65 C16.+
  Bottom 0.152: v58.7,26.77 57.45,28.02 57.45,31.4 55.83,33.02 v55.83,35.52
N$30  (via drill 0.25)
  Top 0.152: R15.1 52.33,43.15 53.33,42.15 v57.58,42.15 59.7,44.27 78.2,44.27 79.33,43.15 79.33,38.4 77.45,38.4 76.33,39.52 69.33,39.52 6N138.2 | v57.95,31.4 59.7,29.65 D2.C
  Bottom 0.152: v57.95,31.4 57.58,31.77 v57.58,42.15
N$32
  Top 0.152: R12.2 63.83,41.77 67.58,41.77 68.58,40.77 77.08,40.77 78.2,39.65 6N138.7
PCLK  (via drill 0.25)
  Top 0.152: v42.45,38.15 X2.11 | v42.83,29.4 42.2,28.77 v23.95,28.77 | v21.57,28.52 21.45,28.4 17.2,28.4 15.95,27.15 15.95,26.77 U1.22
  Bottom 0.152: v42.45,38.15 42.83,37.77 v42.83,29.4 | v23.95,28.77 21.57,28.77 v21.57,28.52
PWM  (via drill 0.25)
  Top 0.152: v44.95,38.52 X2.6 | v25.2,30.4 v45.08,30.4 | v20.32,33.27 19.32,34.27 5.32,34.27 U1.9
  Bottom 0.152: v44.95,38.52 45.08,38.4 v45.08,30.4 | v25.2,30.4 23.32,32.27 20.32,32.27 v20.32,33.27
PWR  (via drill 0.25)
  Top 0.152: v30.32,27.77 27.32,27.77 27.32,25.65 26.32,24.65 19.32,24.65 15.95,21.27 14.32,21.27 14.32,22.77 13.45,23.65 9.57,23.65 9.57,26.65 U1.17
  Bottom 0.152: v30.32,27.77 33.08,30.52 33.08,33.4 33.95,34.27 CONNHEADER.12
R5  (via drill 0.25)
  Top 0.152: v32.45,38.65 X2.31 | v31.45,45.65 31.32,45.52 v9.07,45.52 | v6.45,38.9 5.7,38.15 5.32,38.15 U1.6
  Bottom 0.152: v32.45,38.65 31.45,39.65 v31.45,45.65 | v9.07,45.52 6.45,42.9 v6.45,38.9
R6  (via drill 0.25)
  Top 0.152: X2.30 32.95,38.52 v33.2,38.52 | v9.57,40.65 5.82,36.9 5.32,36.9 U1.7
  Bottom 0.152: v33.2,38.52 32.83,38.15 31.07,38.15 31.07,43.77 29.07,45.77 9.57,45.77 v9.57,40.65
R7  (via drill 0.25)
  Top 0.152: X2.29 33.45,39.02 v33.95,38.52 | v20.32,37.77 18.7,36.15 5.82,36.15 5.32,35.65 U1.8
  Bottom 0.152: v33.95,38.52 33.2,37.77 30.45,37.77 30.45,42.15 29.7,42.9 28.45,42.9 28.45,42.27 23.95,37.77 v20.32,37.77
ROUT  (via drill 0.25)
  Top 0.152: v41.2,26.02 40.83,26.02 40.2,25.4 R23.2 | AUDIO_CONN.5 79.33,2.77 76.7,2.77 AUDIO_CONN.3 76.58,2.77 72.2,2.77 64.33,10.65 53.7,10.65 52.58,9.53 50.95,9.53 49.95,10.53 C14.1 49.83,10.65 v47.7,12.78
  Bottom 0.152: CONNHEADER.5 41.58,31.77 41.58,26.4 v41.2,26.02 47.7,19.52 v47.7,12.78
SCL  (via drill 0.25)
  Top 0.152: v8.2,22.65 8.95,22.65 9.2,22.4 R14.2 | U1.10 5.32,33.02 6.82,33.02 v7.7,32.15 8.32,32.77 v21.57,32.77 | X2.3 46.45,38.52 v47.08,38.52 | v47.08,37.52 46.95,37.65 39.58,37.65 38.7,36.77 v29.32,36.77 | v26.2,32.77 27.7,34.27 28.82,34.27 CONNHEADER.16
  Bottom 0.152: v8.2,22.65 7.7,23.15 v7.7,32.15 | v47.08,37.52 v47.08,38.52 | v29.32,36.77 28.95,36.4 28.95,34.4 CONNHEADER.16 | v26.2,32.77 v21.57,32.77
SDA  (via drill 0.25)
  Top 0.152: v12.45,25.15 15.2,22.4 | v8.2,31.02 7.57,31.65 5.32,31.65 U1.11 | v45.95,38.52 X2.4 | v45.58,37.15 45.45,37.27 39.7,37.27 38.7,36.27 v32.2,36.27 | 15.2,22.4 17.95,25.15 v25.32,25.15 | v27.7,32.02 29.07,33.4 30.57,33.4 31.45,34.27 CONNHEADER.14 | 15.2,22.4 R13.2
  Bottom 0.152: v12.45,25.15 8.2,29.4 v8.2,31.02 | v45.95,38.52 45.58,38.15 v45.58,37.15 | v32.2,36.27 31.45,35.52 CONNHEADER.14 | v25.32,25.15 27.7,27.52 v27.7,32.02
UART0_RXD  (via drill 0.25)
  Top 0.152: v4.7,10.9 4.7,11.65 CP2102.21 | v6.7,34.77 7.7,35.77 19.2,35.77 21.7,38.27 21.7,39.27 22.7,39.27 U1.36
  Bottom 0.152: v4.7,10.9 5.32,11.53 5.32,26.4 6.7,27.77 v6.7,34.77
UART0_TXD  (via drill 0.25)
  Top 0.152: v7.2,10.4 4.2,10.4 4.2,11.65 CP2102.20 | v19.32,37.52 22.45,40.65 U1.37
  Bottom 0.152: v7.2,10.4 9.32,12.53 9.32,19.02 19.32,29.02 v19.32,37.52
USB_RESET  (via drill 0.25)
  Top 0.152: v11.57,19.27 11.32,19.52 2.7,19.52 2.7,18.77 3.32,18.15 5.07,18.15 5.07,15.65 CP2102.9 | v17.07,13.78 18.57,12.28 27.07,12.28 R4.1
  Bottom 0.152: v17.07,13.78 v11.57,19.27
USB_VBUS
  Top 0.152: CP2102.8 5.7,15.65 5.7,18.02 26.82,18.02 R2.1 29.7,17.9 30.2,17.9 R3.2
USBC_D+  (via drill 0.25)
  Top 0.152: v10.32,13.4 6.95,13.4 CP2102.3 | v11.45,8.28 11.95,7.78 16.2,7.78 16.82,7.15 16.82,6.53 J1.A6
  Bottom 0.152: v10.32,13.4 11.45,12.28 v11.45,8.28
USBC_D-  (via drill 0.25)
  Top 0.152: v12.95,15.28 10.45,15.28 9.2,14.03 6.95,14.03 CP2102.4 | v15.7,8.28 15.82,8.15 16.32,8.15 17.32,7.15 17.32,6.53 J1.A7
  Bottom 0.152: v12.95,15.28 15.7,12.53 v15.7,8.28
VSYNC  (via drill 0.25)
  Top 0.152: X2.8 43.95,41.9 v29.95,41.9 | v27.2,39.15 24.82,36.77 22.82,36.77 U1.34
  Bottom 0.152: v27.2,39.15 v29.95,41.9

## Text on the board
tNames: tulip.computer v4/r0